# EAGLE board isolator (EAGLE 6.5.0)
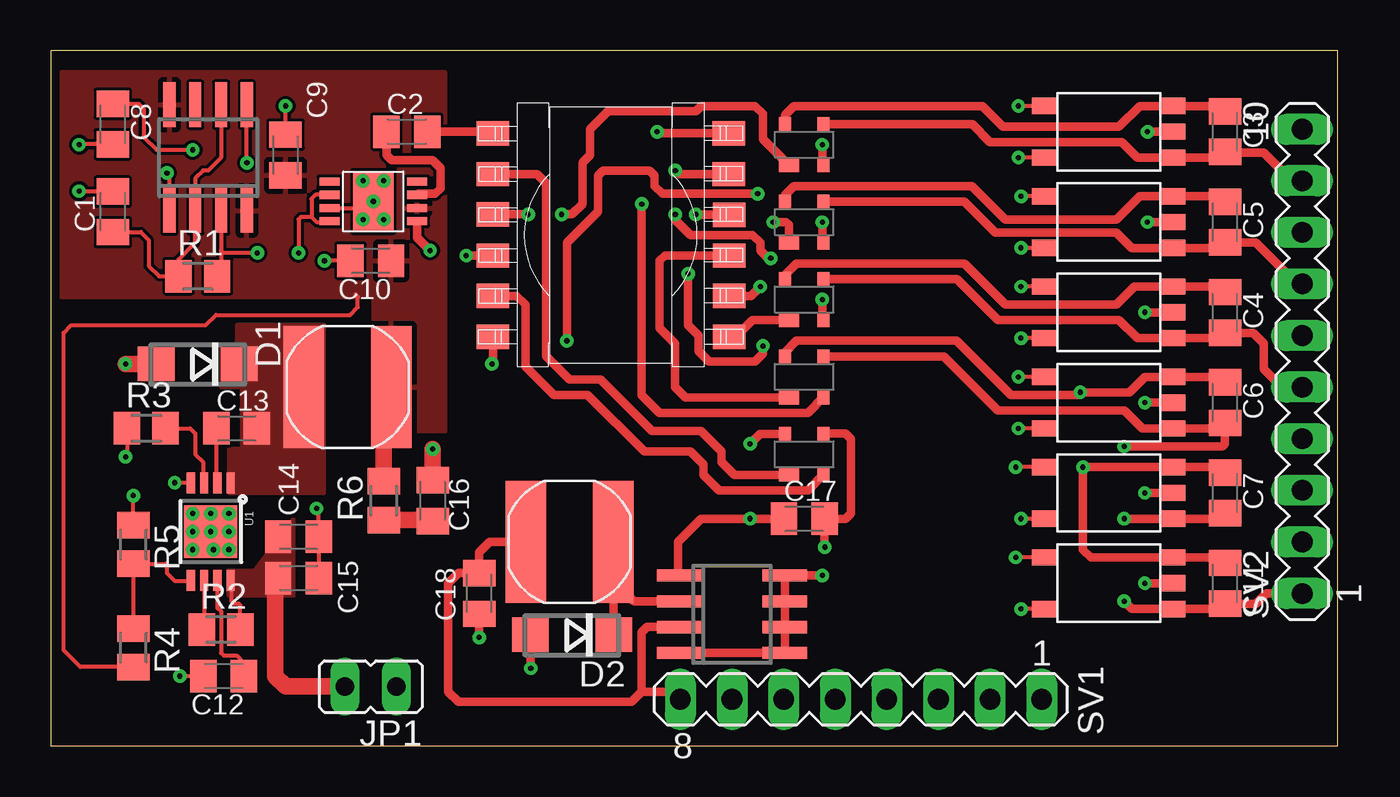
[diagram p0: board, top side]
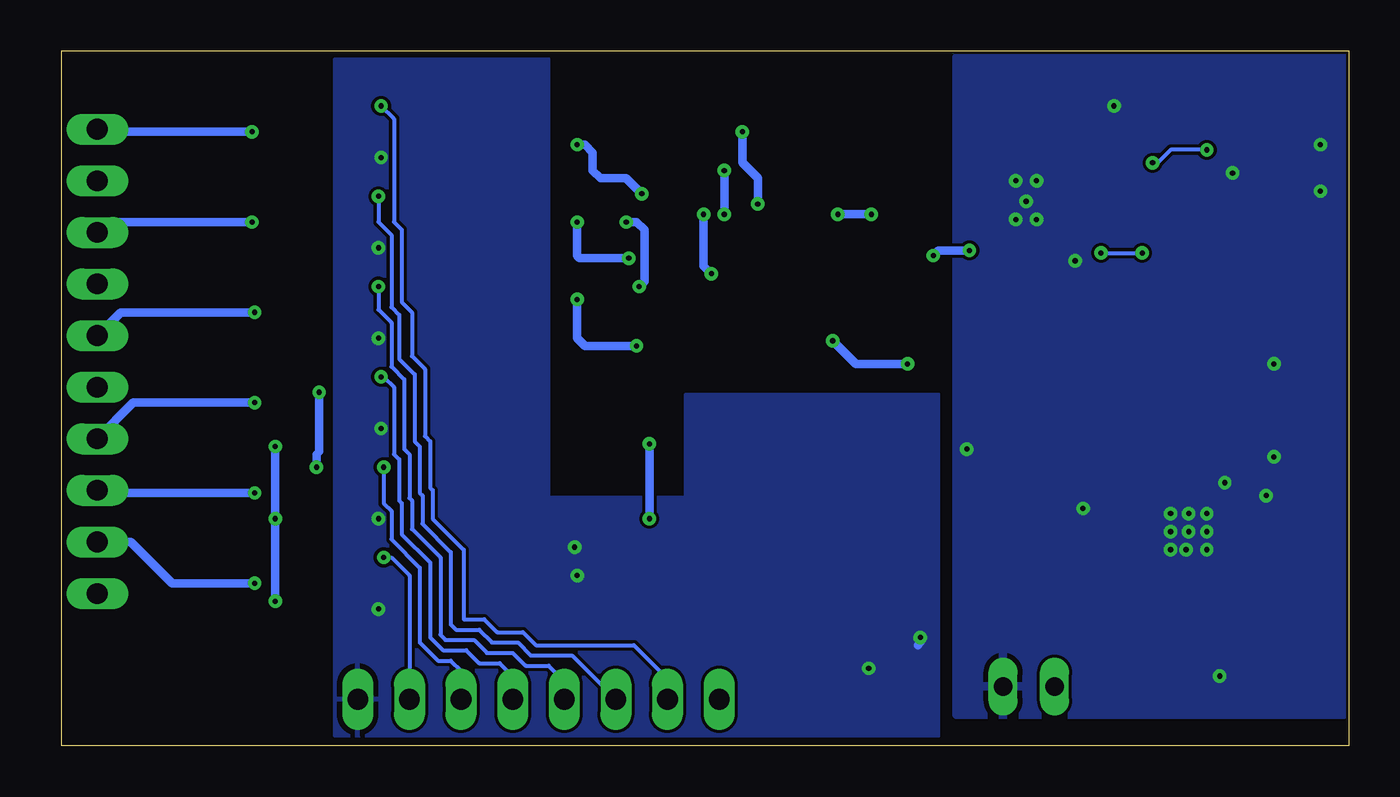
[diagram p1: board, bottom side, seen from below]

Size 63.35 x 34.21 mm. Coordinates in mm from the lower left corner, seen from the top.
Outline: 0,0 63.35,0 63.35,34.21 0,34.21 0,0
Copper layers (1*16): Top 0.035mm / dielectric 1.5mm / Bottom 0.035mm
Design rules "default *": minimum track width 6mil, minimum drill 8mil, track to track 6mil, track to pad 6mil, pad to pad 6mil, via to via 6mil, smd to smd 6mil, copper to edge 6mil, drill to drill 6mil, minimum pad ring 10mil, minimum via ring 8mil, stop-mask expansion 4mil, vias tented up to drill 0mil, thermal gap 10mil

## Footprints (pad centres in the part's own frame; a part is rotated, then mirrored left to right if it is on the bottom)
C0805K = smd 1.3 x 1.6: 1 -1,0; 2 1,0
DO214AC = smd 1.8 x 1.7: A 2.05,0; C -2.05,0
SO08 = smd 0.6 x 2.2: 1 -1.905,-2.6; 2 -0.635,-2.6; 3 0.635,-2.6; 4 1.905,-2.6; 5 1.905,2.6; 6 0.635,2.6; 7 -0.635,2.6; 8 -1.905,2.6
JP1 = drill 0.914 long: 1 0,-1.27; 2 0,1.27
M0805 = smd 1.3 x 1.6: 1 -0.95,0; 2 0.95,0
MA08-1 = drill 1.016 long: 1 -8.89,0; 2 -6.35,0; 3 -3.81,0; 4 -1.27,0; 5 1.27,0; 6 3.81,0; 7 6.35,0; 8 8.89,0
MA10-1 = drill 1.016 long: 1 -11.43,0; 2 -8.89,0; 3 -6.35,0; 4 -3.81,0; 5 -1.27,0; 6 1.27,0; 7 3.81,0; 8 6.35,0; 9 8.89,0; 10 11.43,0
MSOP-8-EP = smd 0.41 x 1.02: 1 -0.975,-2.4; 2 -0.325,-2.4; 3 0.325,-2.4; 4 0.975,-2.4; 5 0.975,2.4; 6 0.325,2.4; 7 -0.325,2.4; 8 -0.975,2.4 | smd 2.6 x 2.6: EP 0,0
HP1 = smd 1.6 x 1.2: P$1 -5.8,5.004; P$2 -5.8,2.997; P$3 -5.8,1.016; P$4 -5.8,-1.016; P$5 -5.8,-2.997; P$6 -5.8,-5.004; P$7 5.833,-5.004; P$8 5.833,-2.997; P$9 5.833,-1.016; P$10 5.833,0.991; P$11 5.808,2.997; P$12 5.808,5.004
HTSSOP8DGN = smd 0.4 x 1: 1 -0.975,-2.15; 2 -0.325,-2.15; 3 0.325,-2.15; 4 0.975,-2.15; 5 0.975,2.15; 6 0.325,2.15; 7 -0.325,2.15; 8 -0.975,2.15 | smd 3 x 2: EXP 0,0
SOT-143 = smd 1 x 0.7: 1 -0.75,-1 | smd 0.6 x 0.7: 2 0.95,-1; 3 0.95,1; 4 -0.95,1
DIP5-SMD = smd 1.2 x 0.8: 1 -3.175,1.27; 3 -3.175,-1.27; 4 3.175,-1.27; 5 3.175,0; 6 3.175,1.27
SRN6045 = smd 2 x 6: P$1 -2.15,0; P$2 2.15,0
SO8 = smd 0.6 x 2.2: 1 -1.905,-2.6; 2 -0.635,-2.6; 3 0.635,-2.6; 4 1.905,-2.6; 5 1.905,2.6; 6 0.635,2.6; 7 -0.635,2.6; 8 -1.905,2.6

## Placement (x,y rotation side)
C1  3.3n  [C0805K]  3.05,26.29 90 top
C2  [C0805K]  17.53,30.23 0 top
C3  .1u  [C0805K]  57.79,30.23 270 top
C4  .1u  [C0805K]  57.79,21.34 270 top
C5  .1u  [C0805K]  57.79,25.78 270 top
C6  .1u  [C0805K]  57.79,16.89 270 top
C7  .1u  [C0805K]  57.79,12.45 270 top
C8  .1u  [C0805K]  3.05,30.61 270 top
C9  .1u  [C0805K]  11.56,29.08 90 top
C10  .1u  [C0805K]  15.75,23.88 180 top
C11  .1u  [C0805K]  57.79,8 270 top
C12  .1u  [C0805K]  8.51,3.43 180 top
C13  10n  [C0805K]  9.14,15.62 0 top
C14  .1u  [C0805K]  12.19,10.29 0 top
C15  1u  [C0805K]  12.19,8.25 0 top
C16  15u  [C0805K]  18.8,12.07 90 top
C17  .1u  [C0805K]  37.08,11.18 0 top
C18  15u  [C0805K]  21.08,7.49 270 top
D1  B170-13-F  [DO214AC]  7.24,18.8 180 top
D2  B170-13-F  [DO214AC]  25.65,5.46 180 top
IC1  LM555D  [SO08]  7.75,28.96 0 top
JP1  [JP1]  15.75,2.92 90 top
R1  1k  [M0805]  7.24,23.11 0 top
R2  200k  [M0805]  8.38,5.71 0 top
R3  100k  [M0805]  4.7,15.62 0 top
R4  3.9k  [M0805]  4.06,4.83 270 top
R5  1k  [M0805]  4.06,9.91 270 top
R6  1  [M0805]  16.38,12.07 90 top
SV1  [MA08-1]  39.88,2.29 180 top
SV2  [MA10-1]  61.59,18.92 90 top
U1  LM5007  [MSOP-8-EP]  7.87,10.54 180 top
U$1  HP1  [HP1]  27.56,25.15 0 top
U$2  UCC27525DGN  [HTSSOP8DGN]  15.88,26.8 270 top
U$3  BAS4002A  [SOT-143]  37.08,29.59 0 top
U$4  BAS4002A  [SOT-143]  37.08,21.97 0 top
U$5  TLP152  [DIP5-SMD]  52.07,21.34 0 top
U$6  BAS4002A  [SOT-143]  37.08,25.78 0 top
U$7  TLP152  [DIP5-SMD]  52.07,30.23 0 top
U$8  TLP152  [DIP5-SMD]  52.07,25.78 0 top
U$9  BAS4002A  [SOT-143]  37.08,18.16 0 top
U$10  TLP152  [DIP5-SMD]  52.07,16.89 0 top
U$11  TLP152  [DIP5-SMD]  52.07,12.45 0 top
U$12  TLP152  [DIP5-SMD]  52.07,8 0 top
U$13  SRN6045-101M  [SRN6045]  14.61,17.65 0 top
U$14  BAS4002A  [SOT-143]  37.08,14.35 0 top
U$15  AP1509  [SO8]  33.53,6.48 270 top
U$16  SRN6045-101M  [SRN6045]  25.53,10.03 180 top

## Library data of the parts
C1-C18 = rcl
D1 D2 = diode
IC1 = linear
JP1 = jumper
R1-R6 = resistor
SV1 SV2 = con-lstb; OC_FARNELL: unknown; OC_NEWARK: unknown
U1 = SparkFun-PowerIC
U$1 U$2 U$5 U$7 U$8 U$10-U$13 U$15 U$16 = brushlessrage
U$3 U$4 U$6 U$9 U$14 = utesla

## Nets
+3V3: C18.1 SV1.8 U$15.3 U$16.P$2
+15V: C9.1 C10.1 IC1.4 IC1.8 R4.2 R6.2 U$2.6 U$13.P$2
DGND: C17.2 C18.2 D2.A SV1.1 U$5.3 U$7.3 U$8.3 U$10.3 U$11.3 U$12.3 U$14.3 U$15.4 U$15.5 U$15.6 U$15.7 U$15.8
DVDD: C17.1 U$14.4 U$15.1
E1: C3.2 SV2.9 U$3.3 U$7.4
E2: C4.2 SV2.5 U$4.3 U$5.4
E3: C5.2 SV2.7 U$6.3 U$8.4
GND: C1.2 C8.2 C9.2 C10.2 C12.2 C14.2 C15.2 C16.2 D1.A IC1.1 JP1.1 R3.1 R5.1 U1.4 U1.EP U$2.3 U$2.EXP
IN1: SV1.7 U$7.1
IN2: SV1.5 U$5.1
IN3: SV1.6 U$8.1
IN4: SV1.4 U$10.1
IN5: SV1.3 U$11.1
IN6: SV1.2 U$12.1
N$1: U$1.P$3 U$3.1
N$2: C3.1 U$3.4 U$7.6
N$4: C2.1 U$2.7
N$5: U$1.P$4 U$2.5
N$6: C1.1 IC1.2 IC1.6 R1.1
N$7: U$1.P$10 U$4.2
N$8: C8.1 IC1.5
N$10: IC1.3 R1.2 U$2.2 U$2.4
N$11: U$1.P$6 U$3.2
N$12: U$1.P$7 U$4.1
N$13: C4.1 U$4.4 U$5.6
N$15: U$1.P$11 U$6.2
N$16: U$1.P$8 U$6.1
N$17: C5.1 U$6.4 U$8.6
N$19: U$1.P$12 U$9.2
N$20: U$1.P$9 U$9.1
N$23: C16.1 R6.1
N$24: U$1.P$5 U$14.2
N$25: C6.1 C7.1 C11.1 U$9.4 U$10.6 U$11.6 U$12.6
N$26: R4.1 R5.2 U1.5
N$27: U$1.P$2 U$14.1
N$28: R2.1 U1.6
N$29: D2.C U$15.2 U$16.P$1
N$30: C2.2 U$1.P$1
N$31: C12.1 U1.7
N$32: C13.2 D1.C U1.1 U$13.P$1
N$33: C13.1 U1.2
N$34: R3.2 U1.3
OUT1: SV2.10 U$7.5
OUT2: SV2.6 U$5.5
OUT3: SV2.8 U$8.5
OUT4: SV2.4 U$10.5
OUT5: SV2.3 U$11.5
OUT6: SV2.2 U$12.5
PGND: C6.2 C7.2 C11.2 SV2.1 U$9.3 U$10.4 U$11.4 U$12.4
VIN: C14.1 C15.1 JP1.2 R2.2 U1.8

## Tracks (layer width: path | path; a pad name or v marks a point on that pad's centre or on a via)
+3V3
  Top 0.406: U$16.P$2 21.59,10.03 21.08,9.52 C18.1 21.07,8.51 20.07,8.51 19.56,8 19.56,2.67 20.07,2.16 28.57,2.16 29.08,2.67 | U$15.3 29.34,5.84 29.08,5.59 29.08,2.67 | 29.08,2.67 30.61,2.67 SV1.8
+15V
  Top 0.203: R4.2 1.46,3.88 0.63,4.7 0.63,20.32 1.02,20.7 7.62,20.7 8.13,21.21 14.73,21.21 15.11,21.59 15.11,22.1 14.99,22.23 | 16.51,17.9 U$13.P$2
  Top 0.813: U$13.P$2 16.75,15.36 16.38,14.99 R6.2
  pour Top: 0.51,22.1 15.88,22.1 15.88,15.49 19.43,15.49 19.43,33.15 0.51,33.15
DGND  (via drill 0.25)
  Top 0.203: U$7.3 v47.62,28.96 | U$8.3 v47.75,24.51 | U$5.3 v47.75,20.07 | U$10.3 v47.62,15.62 | U$11.3 v47.75,11.18 | U$12.3 v47.75,6.73
  Top 0.406: U$14.3 38.05,15.37 39.12,15.37 39.37,15.11 39.37,11.43 39.12,11.18 C17.2 38.08,9.8 v38.1,9.78 | v37.97,8.38 U$15.8 U$15.7 U$15.6 U$15.5 U$15.4 | D2.A 23.6,3.83 v23.62,3.81 | C18.2 v21.08,5.33
  Bottom 0.406: 21.08,5.08 21.21,4.95
  pour Bottom: 39.37,33.78 49.91,33.78 49.91,0.51 20.19,0.51 20.19,17.27 32.64,17.27 32.64,12.19 39.37,12.19
DVDD  (via drill 0.25)
  Top 0.406: U$14.4 34.91,15.35 v34.42,14.86 | C17.1 v34.42,11.18 32,11.18 30.86,10.03 30.86,8.45 U$15.1
  Bottom 0.406: v34.42,14.86 v34.42,11.18
E1
  Top 0.406: U$3.3 45.36,30.59 46.23,29.72 52.71,29.72 53.47,28.96 U$7.4 57.52,28.96 C3.2 57.8,29.21 59.69,29.21 61.09,27.81 SV2.9
E2
  Top 0.406: U$4.3 44.59,22.97 46.61,20.96 52.58,20.96 53.47,20.07 U$5.4 57.52,20.07 C4.2 57.8,20.32 59.18,20.32 59.69,19.81 59.69,18.54 60.58,17.65 SV2.5
E3
  Top 0.406: U$6.3 44.97,26.78 46.48,25.27 52.45,25.27 53.21,24.51 U$8.4 57.52,24.51 C5.2 57.8,24.77 59.31,24.77 61.34,22.73 SV2.7
GND  (via drill 0.25)
  Top 0.203: C15.2 C14.2 13.19,11.57 v13.08,11.68 | R3.1 3.75,14.29 v3.68,14.22 | U1.4 v6.11,12.94 v6.1,12.95 | C12.2 v6.35,3.43 | R5.1 v4.06,12.32 | C1.2 1.41,27.29 v1.4,27.3 | C8.2 1.41,29.61 v1.4,29.59 | IC1.1 5.84,28.07 v5.71,28.19 | C9.2 v11.56,31.5 | U$2.3 15.8,26.47 | 15.8,26.47 15.88,26.54 | 15.8,26.47 16.31,26.47 U$2.EXP | C10.2 v13.46,23.88
  Top 0.813: D1.A v3.68,18.8 | C16.2 v18.8,14.61
  other vias: 6.98,11.43 7.87,11.43 8.76,11.43 8.76,10.54 8.76,9.65 8,9.65 6.98,9.65 6.98,10.54 7.87,10.54 15.37,27.81 16.38,27.81 15.88,26.8 15.37,25.91 16.38,25.91
  pour Bottom: 0.25,33.91 19.3,33.91 19.3,1.52 0.25,1.52
IN1  (via drill 0.25)
  Top 0.203: U$7.1 v47.62,31.5
  Bottom 0.203: SV1.7 33.53,3.3 35.18,4.95 40.01,4.95 40.64,5.59 41.91,5.59 42.55,6.22 43.56,6.22 43.56,9.65 45.09,11.18 45.09,12.57 45.21,12.7 45.21,14.99 45.47,15.24 45.47,18.54 46.1,19.18 46.1,21.34 46.61,21.84 46.61,25.4 46.99,25.78 46.99,30.86 v47.62,31.5
IN2  (via drill 0.25)
  Top 0.203: U$5.1 v47.75,22.61
  Bottom 0.203: v47.75,22.61 47.75,21.46 47.12,20.83 47.12,18.67 46.48,18.03 46.48,14.61 46.23,14.35 46.23,12.19 46.1,12.07 46.1,10.67 44.7,9.27 44.7,5.46 44.45,5.21 43.05,5.21 42.42,4.57 41.15,4.57 40.51,3.94 39.37,3.94 38.61,3.17 SV1.5
IN3  (via drill 0.25)
  Top 0.203: U$8.1 v47.75,27.05
  Bottom 0.203: v47.75,27.05 47.75,25.78 47.12,25.15 47.12,21.59 46.74,21.21 46.74,19.05 45.97,18.29 45.97,14.99 45.72,14.73 45.72,12.45 45.59,12.32 45.59,10.92 44.2,9.52 44.2,5.97 43.94,5.71 42.8,5.71 42.16,5.08 40.89,5.08 40.26,4.45 38.23,4.45 SV1.6
IN4  (via drill 0.25)
  Top 0.203: U$10.1 v47.62,18.16
  Bottom 0.203: v47.62,18.16 47.5,18.16 46.99,17.65 46.99,14.35 46.74,14.1 46.74,12.07 46.61,11.94 46.61,10.41 45.21,9.02 45.21,5.33 44.58,4.7 43.43,4.7 42.8,4.06 41.78,4.06 41.15,3.43 SV1.4
IN5  (via drill 0.25)
  Top 0.203: U$11.1 v47.5,13.72
  Bottom 0.203: v47.5,13.72 47.5,11.94 47.12,11.56 47.12,10.16 45.72,8.76 45.72,5.08 44.83,4.19 44.2,4.19 43.69,3.68 SV1.3
IN6  (via drill 0.25)
  Top 0.203: U$12.1 v47.5,9.27
  Bottom 0.203: v47.5,9.27 47.12,9.27 46.23,8.38 SV1.2
N$1  (via drill 0.25)
  Top 0.406: U$1.P$3 v23.49,26.16 | v25.15,26.16 25.65,26.16 26.16,26.67 26.16,28.7 26.54,29.08 26.54,30.35 27.43,31.24 31.75,31.24 32,31.5 34.67,31.5 35.05,31.12 35.05,29.87 U$3.1
  Bottom 0.406: v23.49,26.16 v25.15,26.16
N$2
  Top 0.406: U$3.4 36.13,31.05 36.58,31.5 45.85,31.5 46.86,30.48 52.58,30.48 53.59,31.5 U$7.6 57.52,31.5 C3.1
N$4
  Top 0.406: C2.1 16.53,29.07 16.76,28.83 18.8,28.83 19.18,28.45 19.18,27.43 18.92,27.18 18.08,27.18 U$2.7
N$5  (via drill 0.25)
  Top 0.406: U$2.5 18.02,25.03 v18.67,24.38 | v20.45,24.13 U$1.P$4
  Bottom 0.406: v18.67,24.38 20.19,24.38 v20.45,24.13
N$6
  Top 0.203: C1.1 4.43,25.29 4.83,24.89 4.83,23.62 5.33,23.11 R1.1 6.29,23.94 7.11,24.77 IC1.2 7.11,27.94 7.49,28.32 7.75,28.32 8.38,28.96 IC1.6
N$7  (via drill 0.25)
  Top 0.406: U$1.P$10 31.77,26.14 v31.75,26.16 | v31.37,23.24 31.37,20.7 31.88,20.19 31.88,19.43 32.38,18.92 34.67,18.92 35.05,19.3 v35.05,19.69 | v37.97,21.97 37.97,21.03 U$4.2
  Bottom 0.406: v31.75,26.16 31.75,23.62 v31.37,23.24 | v35.05,19.69 37.59,19.69 37.97,20.07 v37.97,21.97
N$8  (via drill 0.25)
  Top 0.203: C8.1 4.33,31.61 4.57,31.37 4.57,29.97 5.21,29.34 v6.98,29.34 | v9.65,28.7 IC1.5
  Bottom 0.203: v6.98,29.34 8.76,29.34 9.4,28.7 v9.65,28.7
N$10  (via drill 0.25)
  Top 0.203: IC1.3 8.38,24.38 | 8.38,24.38 8.38,23.31 R1.2 | U$2.2 13.03,27.12 12.83,26.92 12.83,26.04 | 12.83,26.04 13.08,25.78 13.68,25.78 U$2.4 | 12.83,26.04 12.32,26.04 12.19,25.91 v12.19,24.26 | v10.16,24.26 8.51,24.26 8.38,24.38
  Bottom 0.203: v12.19,24.26 v10.16,24.26
N$11  (via drill 0.25)
  Top 0.406: U$1.P$6 21.76,18.84 v21.72,18.8 | v25.4,19.94 25.4,24.77 26.92,26.29 26.92,28.07 27.18,28.32 29.46,28.32 29.72,28.07 29.72,27.56 30.1,27.18 v34.8,27.18 | v37.97,29.59 37.97,28.65 U$3.2
  Bottom 0.406: v21.72,18.8 24.26,18.8 v25.4,19.94 | v34.8,27.18 35.56,27.94 36.83,27.94 37.21,28.32 37.21,29.21 37.59,29.59 v37.97,29.59
N$12
  Top 0.406: U$1.P$7 33.73,20.14 34.54,20.96 36.32,20.96 U$4.1
N$13
  Top 0.406: C4.1 57.52,22.61 U$5.6 53.34,22.61 52.45,21.72 46.99,21.72 44.96,23.75 36.7,23.75 36.13,23.18 U$4.4
N$15  (via drill 0.25)
  Top 0.406: U$1.P$11 30.91,28.14 v30.73,28.32 | v30.73,26.16 30.73,25.91 31.5,25.15 34.54,25.15 34.92,24.77 34.92,24.38 35.31,24 v35.43,24 | v37.97,25.78 37.97,24.84 U$6.2
  Bottom 0.406: v30.73,28.32 v30.73,26.16 | v35.43,24 37.85,24 37.97,24.13 v37.97,25.78
N$16  (via drill 0.25)
  Top 0.406: U$1.P$8 34.47,22.15 v34.92,22.61 | v35.56,25.78 36.2,25.78 36.32,25.65 36.32,24.79 U$6.1
  Bottom 0.406: v35.56,25.78 35.05,25.78 34.67,25.4 34.67,22.86 v34.92,22.61
N$17
  Top 0.406: C5.1 57.52,27.05 U$8.6 53.59,27.05 52.45,25.91 46.99,25.91 45.34,27.56 36.58,27.56 36.13,27.12 U$6.4
N$19  (via drill 0.25)
  Top 0.406: U$1.P$12 29.92,30.15 v29.84,30.23 | v29.08,26.67 29.08,17.27 29.97,16.38 37.26,16.38 U$9.2
  Bottom 0.406: v29.84,30.23 29.84,28.7 29.08,27.94 v29.08,26.67
N$20
  Top 0.406: U$1.P$9 30.23,24.13 29.97,23.88 29.97,20.57 30.73,19.81 30.73,17.65 31.24,17.14 36.32,17.14 U$9.1
N$23
  Top 0.813: R6.1 18.75,11.11 C16.1
N$24
  Top 0.406: U$1.P$5 22.94,22.15 23.37,21.72 23.37,18.67 24.76,17.27 26.42,17.27 29.21,14.48 31.5,14.48 32.13,13.84 32.13,13.34 32.89,12.57 37.26,12.57 U$14.2
N$25  (via drill 0.25)
  Top 0.406: C6.1 57.52,18.16 U$10.6 53.85,18.16 53.09,17.4 v50.67,17.4 50.55,17.27 47.24,17.27 44.58,19.94 36.7,19.94 36.13,19.37 U$9.4 | C7.1 57.52,13.72 U$11.6 v50.8,13.72 50.8,9.65 51.18,9.27 U$12.6 57.52,9.27 C11.1
  Bottom 0.406: v50.8,13.72 50.8,14.35 50.67,14.48 v50.67,17.4
N$26
  Top 0.203: R4.1 R5.2 5.65,8.96 5.71,8.89 5.71,8.51 6.1,8.13 6.89,8.13 U1.5
N$27
  Top 0.406: U$1.P$2 23.93,28.14 24.38,27.69 24.38,19.18 25.53,18.03 27.05,18.03 29.59,15.49 32,15.49 33.02,14.48 33.02,13.97 33.66,13.34 36.32,13.34 U$14.1
N$28
  Top 0.203: U1.6 7.55,5.83 R2.1
N$29
  Top 0.406: U$15.2 28.7,7.11 27.69,8.13 U$16.P$1 27.7,10.01 D2.C
N$30
  Top 0.406: C2.2 21.68,30.23 U$1.P$1
N$31
  Top 0.203: U1.7 8.2,6.79 8.38,6.6 8.38,4.57 8.51,4.45 9.14,4.45 9.53,4.06 9.53,3.45 C12.1
N$32
  pour Top (no thermals): 9.02,19.56 8.38,19.56 8.38,17.65 9.4,17.65 9.4,14.61 8.76,14.61 8.76,12.45 13.46,12.45 13.46,20.7 9.14,20.7 9.14,19.56
N$33
  Top 0.203: C13.1 8.14,13 U1.2
N$34
  Top 0.203: R3.2 6.86,15.62 7.11,15.37 7.11,14.35 7.49,13.97 7.49,13 U1.3
OUT1  (via drill 0.25)
  Top 0.406: U$7.5 v53.98,30.23
  Bottom 0.406: v53.98,30.23 61.47,30.23 SV2.10
OUT2  (via drill 0.25)
  Top 0.406: U$5.5 v53.85,21.34
  Bottom 0.406: v53.85,21.34 60.45,21.34 SV2.6
OUT3  (via drill 0.25)
  Top 0.406: U$8.5 v53.98,25.78
  Bottom 0.406: v53.98,25.78 61.09,25.78 SV2.8
OUT4  (via drill 0.25)
  Top 0.406: U$10.5 v53.85,16.89
  Bottom 0.406: v53.85,16.89 59.82,16.89 SV2.4
OUT5  (via drill 0.25)
  Top 0.406: U$11.5 v53.85,12.45
  Bottom 0.406: v53.85,12.45 61.47,12.45 SV2.3
OUT6  (via drill 0.25)
  Top 0.406: U$12.5 v53.85,8
  Bottom 0.406: v53.85,8 57.91,8 59.94,10.03 SV2.2
PGND  (via drill 0.25)
  Top 0.406: C7.2 57.52,11.18 U$11.4 v52.83,11.18 | v52.83,14.73 57.66,14.73 57.79,14.86 C6.2 57.52,15.62 U$10.4 53.72,15.62 52.83,16.51 46.61,16.51 43.96,19.16 U$9.3 | v52.83,7.11 53.21,6.73 U$12.4 57.52,6.73 C11.2 57.8,6.99 59.31,6.99 59.82,7.49 SV2.1
  Bottom 0.406: v52.83,14.73 v52.83,11.18 v52.83,7.11
VIN
  Top 0.203: R2.2 9.33,6.92 9.27,6.99 9.02,6.99 8.89,7.11 8.89,8.1 U1.8
  Top 0.813: JP1.2 11.56,2.92 11.05,3.43 11.05,7.62
  pour Top (no thermals): 8.89,8.64 10.03,8.64 11.94,11.18 11.94,7.37 8.76,7.37 8.76,8.64